# EAGLE board LilyPad_Light_Sensor-Panel_v20 (EAGLE 7.7.0), part 1 of 4
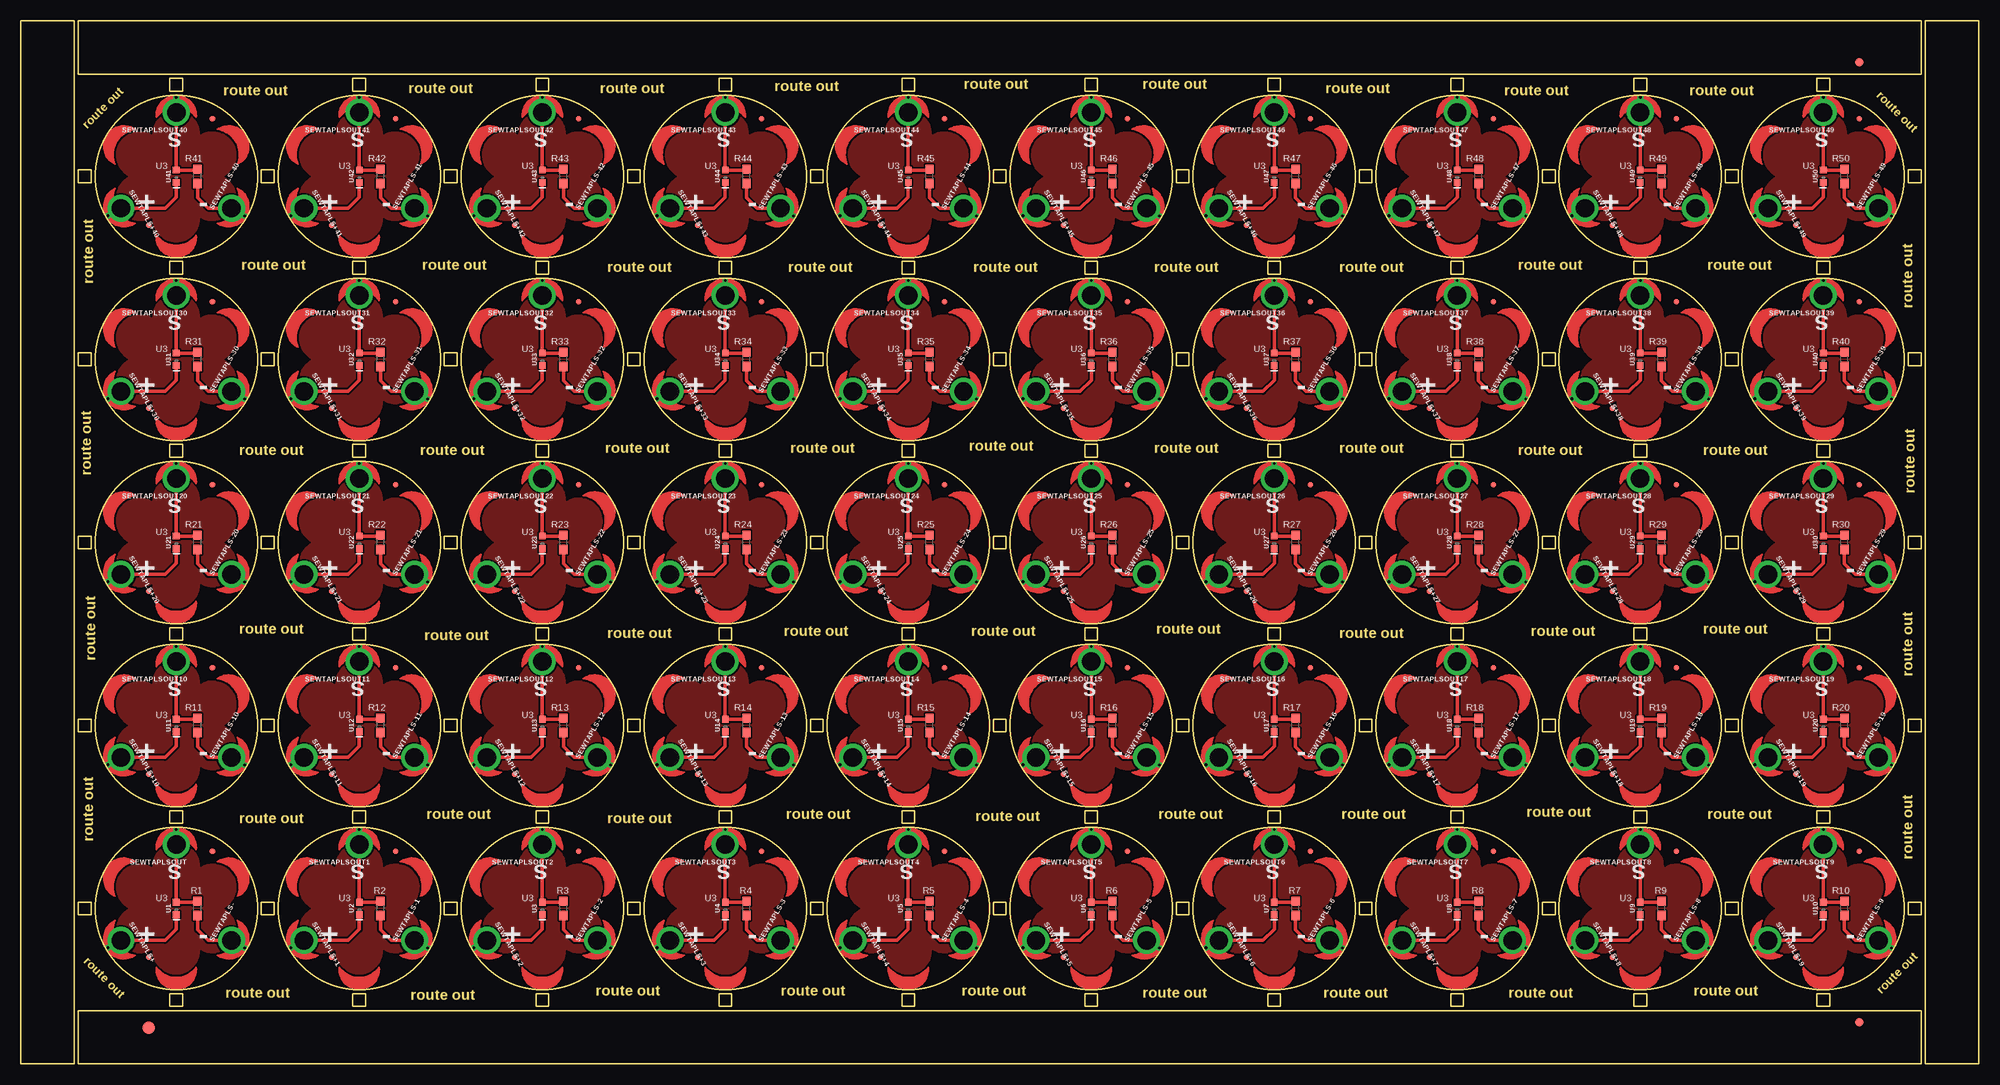
[diagram p0: board, top side]
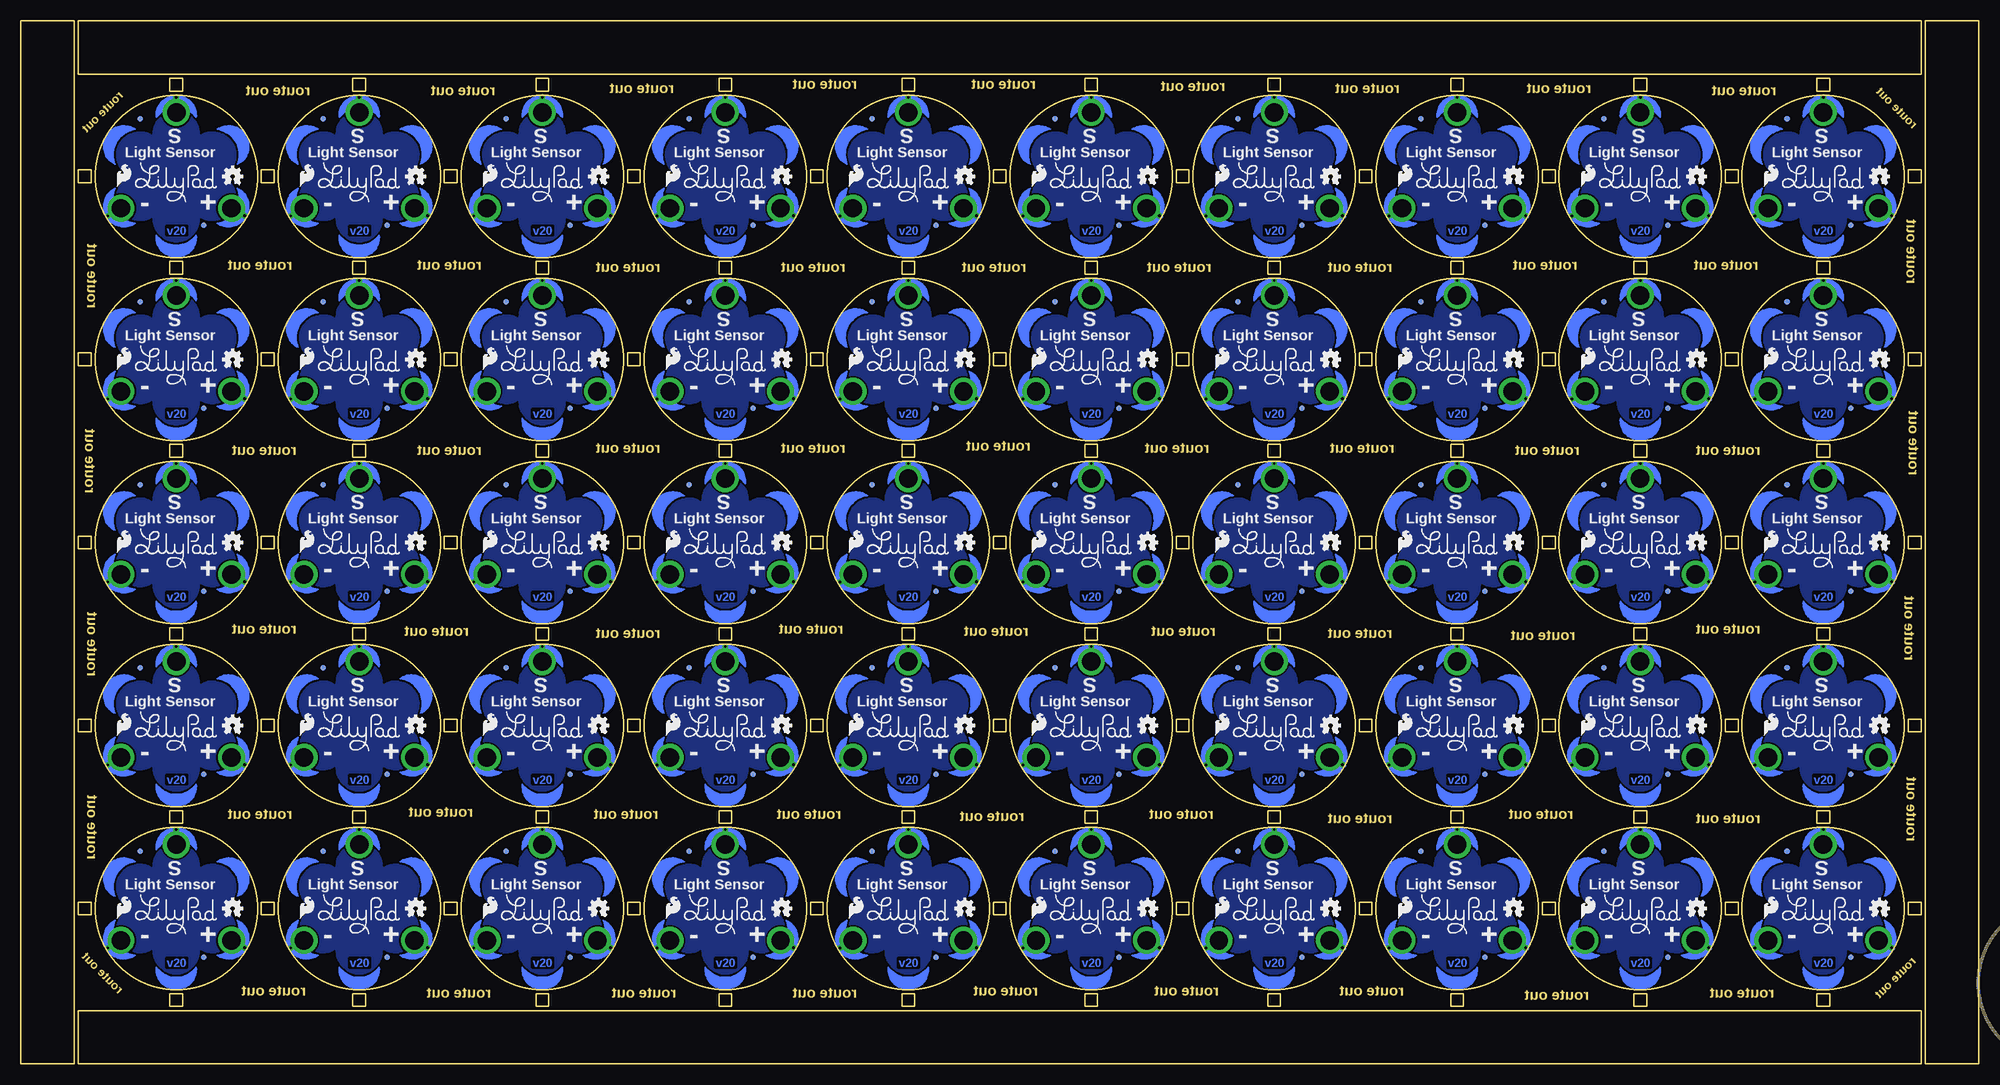
[diagram p1: board, bottom side, seen from below]

Size 233.68 x 124.46 mm. Coordinates in mm from the lower left corner, seen from the top.
Outline: 6.35,78.99 6.35,0 0,0 0,29.46
Outline: 0,26.92 0,124.46 6.35,124.46 6.35,76.45
Outline: 79.25,0 6.86,0 6.86,6.35 29.72,6.35
Outline: 27.18,6.35 226.82,6.35 226.82,0 76.71,0
Outline: 154.43,124.46 226.82,124.46 226.82,118.11 203.96,118.11
Outline: 206.5,118.11 6.86,118.11 6.86,124.46 156.97,124.46
Outline: 227.33,45.21 227.33,124.46 233.68,124.46 233.68,94.74
Outline: 233.68,97.28 233.68,0 227.33,0 227.33,47.75
Outline: 19.3,6.86 19.3,8.38 17.78,8.38 17.78,6.86 19.3,6.86
Outline: 8.38,17.78 8.38,19.3 6.86,19.3 6.86,17.78 8.38,17.78
Outline: 41.15,6.86 41.15,8.38 39.62,8.38 39.62,6.86 41.15,6.86
Outline: 30.23,17.78 30.23,19.3 28.7,19.3 28.7,17.78 30.23,17.78
Outline: 62.99,6.86 62.99,8.38 61.47,8.38 61.47,6.86 62.99,6.86
Outline: 52.07,17.78 52.07,19.3 50.55,19.3 50.55,17.78 52.07,17.78
Outline: 84.84,6.86 84.84,8.38 83.31,8.38 83.31,6.86 84.84,6.86
Outline: 73.91,17.78 73.91,19.3 72.39,19.3 72.39,17.78 73.91,17.78
Outline: 106.68,6.86 106.68,8.38 105.16,8.38 105.16,6.86 106.68,6.86
Outline: 95.76,17.78 95.76,19.3 94.23,19.3 94.23,17.78 95.76,17.78
Outline: 128.52,6.86 128.52,8.38 127,8.38 127,6.86 128.52,6.86
Outline: 117.6,17.78 117.6,19.3 116.08,19.3 116.08,17.78 117.6,17.78
Outline: 150.37,6.86 150.37,8.38 148.84,8.38 148.84,6.86 150.37,6.86
Outline: 139.45,17.78 139.45,19.3 137.92,19.3 137.92,17.78 139.45,17.78
Outline: 172.21,6.86 172.21,8.38 170.69,8.38 170.69,6.86 172.21,6.86
Outline: 161.29,17.78 161.29,19.3 159.77,19.3 159.77,17.78 161.29,17.78
Outline: 194.06,6.86 194.06,8.38 192.53,8.38 192.53,6.86 194.06,6.86
Outline: 183.13,17.78 183.13,19.3 181.61,19.3 181.61,17.78 183.13,17.78
Outline: 215.9,6.86 215.9,8.38 214.38,8.38 214.38,6.86 215.9,6.86
Outline: 204.98,17.78 204.98,19.3 203.45,19.3 203.45,17.78 204.98,17.78
Outline: 226.82,17.78 226.82,19.3 225.3,19.3 225.3,17.78 226.82,17.78
Outline: 19.3,28.7 19.3,30.23 17.78,30.23 17.78,28.7 19.3,28.7
Outline: 8.38,39.62 8.38,41.15 6.86,41.15 6.86,39.62 8.38,39.62
Outline: 41.15,28.7 41.15,30.23 39.62,30.23 39.62,28.7 41.15,28.7
Outline: 30.23,39.62 30.23,41.15 28.7,41.15 28.7,39.62 30.23,39.62
Outline: 62.99,28.7 62.99,30.23 61.47,30.23 61.47,28.7 62.99,28.7
Outline: 52.07,39.62 52.07,41.15 50.55,41.15 50.55,39.62 52.07,39.62
Outline: 84.84,28.7 84.84,30.23 83.31,30.23 83.31,28.7 84.84,28.7
Outline: 73.91,39.62 73.91,41.15 72.39,41.15 72.39,39.62 73.91,39.62
Outline: 106.68,28.7 106.68,30.23 105.16,30.23 105.16,28.7 106.68,28.7
Outline: 95.76,39.62 95.76,41.15 94.23,41.15 94.23,39.62 95.76,39.62
Outline: 128.52,28.7 128.52,30.23 127,30.23 127,28.7 128.52,28.7
Outline: 117.6,39.62 117.6,41.15 116.08,41.15 116.08,39.62 117.6,39.62
Outline: 150.37,28.7 150.37,30.23 148.84,30.23 148.84,28.7 150.37,28.7
Outline: 139.45,39.62 139.45,41.15 137.92,41.15 137.92,39.62 139.45,39.62
Outline: 172.21,28.7 172.21,30.23 170.69,30.23 170.69,28.7 172.21,28.7
Outline: 161.29,39.62 161.29,41.15 159.77,41.15 159.77,39.62 161.29,39.62
Outline: 194.06,28.7 194.06,30.23 192.53,30.23 192.53,28.7 194.06,28.7
Outline: 183.13,39.62 183.13,41.15 181.61,41.15 181.61,39.62 183.13,39.62
Outline: 215.9,28.7 215.9,30.23 214.38,30.23 214.38,28.7 215.9,28.7
Outline: 204.98,39.62 204.98,41.15 203.45,41.15 203.45,39.62 204.98,39.62
Outline: 226.82,39.62 226.82,41.15 225.3,41.15 225.3,39.62 226.82,39.62
Outline: 19.3,50.55 19.3,52.07 17.78,52.07 17.78,50.55 19.3,50.55
Outline: 8.38,61.47 8.38,62.99 6.86,62.99 6.86,61.47 8.38,61.47
Outline: 41.15,50.55 41.15,52.07 39.62,52.07 39.62,50.55 41.15,50.55
Outline: 30.23,61.47 30.23,62.99 28.7,62.99 28.7,61.47 30.23,61.47
Outline: 62.99,50.55 62.99,52.07 61.47,52.07 61.47,50.55 62.99,50.55
Outline: 52.07,61.47 52.07,62.99 50.55,62.99 50.55,61.47 52.07,61.47
Outline: 84.84,50.55 84.84,52.07 83.31,52.07 83.31,50.55 84.84,50.55
Outline: 73.91,61.47 73.91,62.99 72.39,62.99 72.39,61.47 73.91,61.47
Outline: 106.68,50.55 106.68,52.07 105.16,52.07 105.16,50.55 106.68,50.55
Outline: 95.76,61.47 95.76,62.99 94.23,62.99 94.23,61.47 95.76,61.47
Outline: 128.52,50.55 128.52,52.07 127,52.07 127,50.55 128.52,50.55
Outline: 117.6,61.47 117.6,62.99 116.08,62.99 116.08,61.47 117.6,61.47
Outline: 150.37,50.55 150.37,52.07 148.84,52.07 148.84,50.55 150.37,50.55
Outline: 139.45,61.47 139.45,62.99 137.92,62.99 137.92,61.47 139.45,61.47
Outline: 172.21,50.55 172.21,52.07 170.69,52.07 170.69,50.55 172.21,50.55
Outline: 161.29,61.47 161.29,62.99 159.77,62.99 159.77,61.47 161.29,61.47
Outline: 194.06,50.55 194.06,52.07 192.53,52.07 192.53,50.55 194.06,50.55
Outline: 183.13,61.47 183.13,62.99 181.61,62.99 181.61,61.47 183.13,61.47
Outline: 215.9,50.55 215.9,52.07 214.38,52.07 214.38,50.55 215.9,50.55
Outline: 204.98,61.47 204.98,62.99 203.45,62.99 203.45,61.47 204.98,61.47
Outline: 226.82,61.47 226.82,62.99 225.3,62.99 225.3,61.47 226.82,61.47
Outline: 19.3,72.39 19.3,73.91 17.78,73.91 17.78,72.39 19.3,72.39
Outline: 8.38,83.31 8.38,84.84 6.86,84.84 6.86,83.31 8.38,83.31
Outline: 41.15,72.39 41.15,73.91 39.62,73.91 39.62,72.39 41.15,72.39
Outline: 30.23,83.31 30.23,84.84 28.7,84.84 28.7,83.31 30.23,83.31
Outline: 62.99,72.39 62.99,73.91 61.47,73.91 61.47,72.39 62.99,72.39
Outline: 52.07,83.31 52.07,84.84 50.55,84.84 50.55,83.31 52.07,83.31
Outline: 84.84,72.39 84.84,73.91 83.31,73.91 83.31,72.39 84.84,72.39
Outline: 73.91,83.31 73.91,84.84 72.39,84.84 72.39,83.31 73.91,83.31
Outline: 106.68,72.39 106.68,73.91 105.16,73.91 105.16,72.39 106.68,72.39
Outline: 95.76,83.31 95.76,84.84 94.23,84.84 94.23,83.31 95.76,83.31
Outline: 128.52,72.39 128.52,73.91 127,73.91 127,72.39 128.52,72.39
Outline: 117.6,83.31 117.6,84.84 116.08,84.84 116.08,83.31 117.6,83.31
Outline: 150.37,72.39 150.37,73.91 148.84,73.91 148.84,72.39 150.37,72.39
Outline: 139.45,83.31 139.45,84.84 137.92,84.84 137.92,83.31 139.45,83.31
Outline: 172.21,72.39 172.21,73.91 170.69,73.91 170.69,72.39 172.21,72.39
Outline: 161.29,83.31 161.29,84.84 159.77,84.84 159.77,83.31 161.29,83.31
Outline: 194.06,72.39 194.06,73.91 192.53,73.91 192.53,72.39 194.06,72.39
Outline: 183.13,83.31 183.13,84.84 181.61,84.84 181.61,83.31 183.13,83.31
Outline: 215.9,72.39 215.9,73.91 214.38,73.91 214.38,72.39 215.9,72.39
Outline: 204.98,83.31 204.98,84.84 203.45,84.84 203.45,83.31 204.98,83.31
Outline: 226.82,83.31 226.82,84.84 225.3,84.84 225.3,83.31 226.82,83.31
Outline: 19.3,116.08 19.3,117.6 17.78,117.6 17.78,116.08 19.3,116.08
Outline: 19.3,94.23 19.3,95.76 17.78,95.76 17.78,94.23 19.3,94.23
Outline: 8.38,105.16 8.38,106.68 6.86,106.68 6.86,105.16 8.38,105.16
Outline: 41.15,116.08 41.15,117.6 39.62,117.6 39.62,116.08 41.15,116.08
Outline: 41.15,94.23 41.15,95.76 39.62,95.76 39.62,94.23 41.15,94.23
Outline: 30.23,105.16 30.23,106.68 28.7,106.68 28.7,105.16 30.23,105.16
Outline: 62.99,116.08 62.99,117.6 61.47,117.6 61.47,116.08 62.99,116.08
Outline: 62.99,94.23 62.99,95.76 61.47,95.76 61.47,94.23 62.99,94.23
Outline: 52.07,105.16 52.07,106.68 50.55,106.68 50.55,105.16 52.07,105.16
Outline: 84.84,116.08 84.84,117.6 83.31,117.6 83.31,116.08 84.84,116.08
Outline: 84.84,94.23 84.84,95.76 83.31,95.76 83.31,94.23 84.84,94.23
Outline: 73.91,105.16 73.91,106.68 72.39,106.68 72.39,105.16 73.91,105.16
Outline: 106.68,116.08 106.68,117.6 105.16,117.6 105.16,116.08 106.68,116.08
Outline: 106.68,94.23 106.68,95.76 105.16,95.76 105.16,94.23 106.68,94.23
Outline: 95.76,105.16 95.76,106.68 94.23,106.68 94.23,105.16 95.76,105.16
Outline: 128.52,116.08 128.52,117.6 127,117.6 127,116.08 128.52,116.08
Outline: 128.52,94.23 128.52,95.76 127,95.76 127,94.23 128.52,94.23
Outline: 117.6,105.16 117.6,106.68 116.08,106.68 116.08,105.16 117.6,105.16
Outline: 150.37,116.08 150.37,117.6 148.84,117.6 148.84,116.08 150.37,116.08
Outline: 150.37,94.23 150.37,95.76 148.84,95.76 148.84,94.23 150.37,94.23
Outline: 139.45,105.16 139.45,106.68 137.92,106.68 137.92,105.16 139.45,105.16
Outline: 172.21,116.08 172.21,117.6 170.69,117.6 170.69,116.08 172.21,116.08
Outline: 172.21,94.23 172.21,95.76 170.69,95.76 170.69,94.23 172.21,94.23
Outline: 161.29,105.16 161.29,106.68 159.77,106.68 159.77,105.16 161.29,105.16
Outline: 194.06,116.08 194.06,117.6 192.53,117.6 192.53,116.08 194.06,116.08
Outline: 194.06,94.23 194.06,95.76 192.53,95.76 192.53,94.23 194.06,94.23
Outline: 183.13,105.16 183.13,106.68 181.61,106.68 181.61,105.16 183.13,105.16
Outline: 215.9,116.08 215.9,117.6 214.38,117.6 214.38,116.08 215.9,116.08
Outline: 215.9,94.23 215.9,95.76 214.38,95.76 214.38,94.23 215.9,94.23
Outline: 204.98,105.16 204.98,106.68 203.45,106.68 203.45,105.16 204.98,105.16
Outline: 226.82,105.16 226.82,106.68 225.3,106.68 225.3,105.16 226.82,105.16
Outline: circle at 18.54,18.54 radius 9.65
Outline: circle at 40.39,18.54 radius 9.65
Outline: circle at 62.23,18.54 radius 9.65
Outline: circle at 84.07,18.54 radius 9.65
Outline: circle at 105.92,18.54 radius 9.65
Outline: circle at 127.76,18.54 radius 9.65
Outline: circle at 149.61,18.54 radius 9.65
Outline: circle at 171.45,18.54 radius 9.65
Outline: circle at 193.29,18.54 radius 9.65
Outline: circle at 215.14,18.54 radius 9.65
Outline: circle at 18.54,40.39 radius 9.65
Outline: circle at 40.39,40.39 radius 9.65
Outline: circle at 62.23,40.39 radius 9.65
Outline: circle at 84.07,40.39 radius 9.65
Outline: circle at 105.92,40.39 radius 9.65
Outline: circle at 127.76,40.39 radius 9.65
Outline: circle at 149.61,40.39 radius 9.65
Outline: circle at 171.45,40.39 radius 9.65
Outline: circle at 193.29,40.39 radius 9.65
Outline: circle at 215.14,40.39 radius 9.65
Copper layers (1*16): Top 0.035mm / dielectric 1.5mm / Bottom 0.035mm
Design rules "SparkFun-2-layer-TIGHT *": minimum track width 7mil, minimum drill 15mil, track to track 8mil, track to pad 8mil, pad to pad 8mil, via to via 8mil, smd to smd 8mil, copper to edge 7mil, drill to drill 7mil, minimum pad ring 7mil, minimum via ring 7mil, stop-mask expansion 4mil, vias tented up to drill 25mil, thermal gap 10mil
tRestrict: area 13.2,23.6 to 23.9,28.7; area 8.2,18.5 to 15.6,27.7; area 8.2,9.4 to 15.6,18.5; area 13.5,8.4 to 23.9,13.5; area 21.5,9.4 to 29.2,18.5; area 21.5,18.5 to 29.2,27.7; area 35.1,23.6 to 45.7,28.7; area 30,18.5 to 37.5,27.7; area 30,9.4 to 37.5,18.5; area 35.4,8.4 to 45.7,13.5; area 43.3,9.4 to 51,18.5; area 43.3,18.5 to 51,27.7; area 56.9,23.6 to 67.6,28.7; area 51.9,18.5 to 59.3,27.7; area 51.9,9.4 to 59.3,18.5; area 57.2,8.4 to 67.6,13.5; area 65.2,9.4 to 72.9,18.5; area 65.2,18.5 to 72.9,27.7; area 78.7,23.6 to 89.4,28.7; area 73.7,18.5 to 81.2,27.7; area 73.7,9.4 to 81.2,18.5; area 79.1,8.4 to 89.4,13.5; area 87,9.4 to 94.7,18.5; area 87,18.5 to 94.7,27.7; area 100.6,23.6 to 111.2,28.7; area 95.6,18.5 to 103,27.7; area 95.6,9.4 to 103,18.5; area 100.9,8.4 to 111.2,13.5; area 108.8,9.4 to 116.6,18.5; area 108.8,18.5 to 116.6,27.7; area 122.4,23.6 to 133.1,28.7; area 117.4,18.5 to 124.8,27.7; area 117.4,9.4 to 124.8,18.5; area 122.8,8.4 to 133.1,13.5; area 130.7,9.4 to 138.4,18.5; area 130.7,18.5 to 138.4,27.7; area 144.3,23.6 to 154.9,28.7; area 139.3,18.5 to 146.7,27.7; area 139.3,9.4 to 146.7,18.5; area 144.6,8.4 to 154.9,13.5; area 152.5,9.4 to 160.3,18.5; area 152.5,18.5 to 160.3,27.7; area 166.1,23.6 to 176.8,28.7; area 161.1,18.5 to 168.5,27.7; area 161.1,9.4 to 168.5,18.5; area 166.4,8.4 to 176.8,13.5; area 174.4,9.4 to 182.1,18.5; area 174.4,18.5 to 182.1,27.7; area 188,23.6 to 198.6,28.7; area 183,18.5 to 190.4,27.7; area 183,9.4 to 190.4,18.5; area 188.3,8.4 to 198.6,13.5; area 196.2,9.4 to 204,18.5; area 196.2,18.5 to 204,27.7; area 209.8,23.6 to 220.5,28.7; area 204.8,18.5 to 212.2,27.7; area 204.8,9.4 to 212.2,18.5; area 210.1,8.4 to 220.5,13.5; area 218.1,9.4 to 225.8,18.5; area 218.1,18.5 to 225.8,27.7; area 13.2,45.4 to 23.9,50.5; area 8.2,40.4 to 15.6,49.5; area 8.2,31.2 to 15.6,40.4; area 13.5,30.2 to 23.9,35.3; area 21.5,31.2 to 29.2,40.4; area 21.5,40.4 to 29.2,49.5; area 35.1,45.4 to 45.7,50.5; area 30,40.4 to 37.5,49.5; area 30,31.2 to 37.5,40.4; area 35.4,30.2 to 45.7,35.3; area 43.3,31.2 to 51,40.4; area 43.3,40.4 to 51,49.5; area 56.9,45.4 to 67.6,50.5; area 51.9,40.4 to 59.3,49.5; area 51.9,31.2 to 59.3,40.4; area 57.2,30.2 to 67.6,35.3; area 65.2,31.2 to 72.9,40.4; area 65.2,40.4 to 72.9,49.5; area 78.7,45.4 to 89.4,50.5; area 73.7,40.4 to 81.2,49.5; area 73.7,31.2 to 81.2,40.4; area 79.1,30.2 to 89.4,35.3; area 87,31.2 to 94.7,40.4; area 87,40.4 to 94.7,49.5; area 100.6,45.4 to 111.2,50.5; area 95.6,40.4 to 103,49.5; area 95.6,31.2 to 103,40.4; area 100.9,30.2 to 111.2,35.3; area 108.8,31.2 to 116.6,40.4; area 108.8,40.4 to 116.6,49.5; area 122.4,45.4 to 133.1,50.5; area 117.4,40.4 to 124.8,49.5; area 117.4,31.2 to 124.8,40.4; area 122.8,30.2 to 133.1,35.3; area 130.7,31.2 to 138.4,40.4; area 130.7,40.4 to 138.4,49.5; area 144.3,45.4 to 154.9,50.5; area 139.3,40.4 to 146.7,49.5; area 139.3,31.2 to 146.7,40.4; area 144.6,30.2 to 154.9,35.3; area 152.5,31.2 to 160.3,40.4; area 152.5,40.4 to 160.3,49.5; area 166.1,45.4 to 176.8,50.5; area 161.1,40.4 to 168.5,49.5; area 161.1,31.2 to 168.5,40.4; area 166.4,30.2 to 176.8,35.3; area 174.4,31.2 to 182.1,40.4; area 174.4,40.4 to 182.1,49.5; area 188,45.4 to 198.6,50.5; area 183,40.4 to 190.4,49.5; area 183,31.2 to 190.4,40.4; area 188.3,30.2 to 198.6,35.3; area 196.2,31.2 to 204,40.4; area 196.2,40.4 to 204,49.5; area 209.8,45.4 to 220.5,50.5; area 204.8,40.4 to 212.2,49.5; area 204.8,31.2 to 212.2,40.4; area 210.1,30.2 to 220.5,35.3; area 218.1,31.2 to 225.8,40.4; area 218.1,40.4 to 225.8,49.5; area 13.2,67.3 to 23.9,72.4; area 8.2,62.2 to 15.6,71.4; area 8.2,53.1 to 15.6,62.2; area 13.5,52.1 to 23.9,57.2; area 21.5,53.1 to 29.2,62.2; area 21.5,62.2 to 29.2,71.4; area 35.1,67.3 to 45.7,72.4; area 30,62.2 to 37.5,71.4; area 30,53.1 to 37.5,62.2; area 35.4,52.1 to 45.7,57.2; area 43.3,53.1 to 51,62.2; area 43.3,62.2 to 51,71.4; area 56.9,67.3 to 67.6,72.4; area 51.9,62.2 to 59.3,71.4; area 51.9,53.1 to 59.3,62.2; area 57.2,52.1 to 67.6,57.2; area 65.2,53.1 to 72.9,62.2; area 65.2,62.2 to 72.9,71.4; area 78.7,67.3 to 89.4,72.4; area 73.7,62.2 to 81.2,71.4; area 73.7,53.1 to 81.2,62.2; area 79.1,52.1 to 89.4,57.2; area 87,53.1 to 94.7,62.2; area 87,62.2 to 94.7,71.4; area 100.6,67.3 to 111.2,72.4; area 95.6,62.2 to 103,71.4; area 95.6,53.1 to 103,62.2; area 100.9,52.1 to 111.2,57.2; area 108.8,53.1 to 116.6,62.2; area 108.8,62.2 to 116.6,71.4; area 122.4,67.3 to 133.1,72.4; area 117.4,62.2 to 124.8,71.4; area 117.4,53.1 to 124.8,62.2; area 122.8,52.1 to 133.1,57.2; area 130.7,53.1 to 138.4,62.2; area 130.7,62.2 to 138.4,71.4; area 144.3,67.3 to 154.9,72.4; area 139.3,62.2 to 146.7,71.4; area 139.3,53.1 to 146.7,62.2; area 144.6,52.1 to 154.9,57.2; area 152.5,53.1 to 160.3,62.2; area 152.5,62.2 to 160.3,71.4; area 166.1,67.3 to 176.8,72.4; area 161.1,62.2 to 168.5,71.4; area 161.1,53.1 to 168.5,62.2; area 166.4,52.1 to 176.8,57.2; area 174.4,53.1 to 182.1,62.2; area 174.4,62.2 to 182.1,71.4; area 188,67.3 to 198.6,72.4; area 183,62.2 to 190.4,71.4; area 183,53.1 to 190.4,62.2; area 188.3,52.1 to 198.6,57.2; area 196.2,53.1 to 204,62.2; area 196.2,62.2 to 204,71.4; area 209.8,67.3 to 220.5,72.4; area 204.8,62.2 to 212.2,71.4; area 204.8,53.1 to 212.2,62.2; area 210.1,52.1 to 220.5,57.2; area 218.1,53.1 to 225.8,62.2; area 218.1,62.2 to 225.8,71.4; area 13.2,89.1 to 23.9,94.2; area 8.2,84.1 to 15.6,93.2; area 8.2,74.9 to 15.6,84.1; area 13.5,73.9 to 23.9,79; area 21.5,74.9 to 29.2,84.1; area 21.5,84.1 to 29.2,93.2; area 35.1,89.1 to 45.7,94.2; area 30,84.1 to 37.5,93.2; area 30,74.9 to 37.5,84.1; area 35.4,73.9 to 45.7,79; area 43.3,74.9 to 51,84.1; area 43.3,84.1 to 51,93.2; area 56.9,89.1 to 67.6,94.2; area 51.9,84.1 to 59.3,93.2; area 51.9,74.9 to 59.3,84.1; area 57.2,73.9 to 67.6,79; area 65.2,74.9 to 72.9,84.1; area 65.2,84.1 to 72.9,93.2; area 78.7,89.1 to 89.4,94.2; area 73.7,84.1 to 81.2,93.2; area 73.7,74.9 to 81.2,84.1; area 79.1,73.9 to 89.4,79; area 87,74.9 to 94.7,84.1; area 87,84.1 to 94.7,93.2; area 100.6,89.1 to 111.2,94.2; area 95.6,84.1 to 103,93.2; area 95.6,74.9 to 103,84.1; area 100.9,73.9 to 111.2,79; area 108.8,74.9 to 116.6,84.1; area 108.8,84.1 to 116.6,93.2; area 122.4,89.1 to 133.1,94.2; area 117.4,84.1 to 124.8,93.2; area 117.4,74.9 to 124.8,84.1; area 122.8,73.9 to 133.1,79; area 130.7,74.9 to 138.4,84.1; area 130.7,84.1 to 138.4,93.2; area 144.3,89.1 to 154.9,94.2; area 139.3,84.1 to 146.7,93.2; area 139.3,74.9 to 146.7,84.1; area 144.6,73.9 to 154.9,79; area 152.5,74.9 to 160.3,84.1; area 152.5,84.1 to 160.3,93.2; area 166.1,89.1 to 176.8,94.2; area 161.1,84.1 to 168.5,93.2; area 161.1,74.9 to 168.5,84.1; area 166.4,73.9 to 176.8,79; area 174.4,74.9 to 182.1,84.1; area 174.4,84.1 to 182.1,93.2; area 188,89.1 to 198.6,94.2; area 183,84.1 to 190.4,93.2; area 183,74.9 to 190.4,84.1; area 188.3,73.9 to 198.6,79; area 196.2,74.9 to 204,84.1; area 196.2,84.1 to 204,93.2; area 209.8,89.1 to 220.5,94.2; area 204.8,84.1 to 212.2,93.2; area 204.8,74.9 to 212.2,84.1; area 210.1,73.9 to 220.5,79; area 218.1,74.9 to 225.8,84.1; area 218.1,84.1 to 225.8,93.2; area 13.2,111 to 23.9,116.1; area 8.2,105.9 to 15.6,115.1; area 8.2,96.8 to 15.6,105.9; area 13.5,95.8 to 23.9,100.9; area 21.5,96.8 to 29.2,105.9; area 21.5,105.9 to 29.2,115.1; area 35.1,111 to 45.7,116.1; area 30,105.9 to 37.5,115.1; area 30,96.8 to 37.5,105.9; area 35.4,95.8 to 45.7,100.9; area 43.3,96.8 to 51,105.9; area 43.3,105.9 to 51,115.1; area 56.9,111 to 67.6,116.1; area 51.9,105.9 to 59.3,115.1; area 51.9,96.8 to 59.3,105.9; area 57.2,95.8 to 67.6,100.9; area 65.2,96.8 to 72.9,105.9; area 65.2,105.9 to 72.9,115.1; area 78.7,111 to 89.4,116.1; area 73.7,105.9 to 81.2,115.1; area 73.7,96.8 to 81.2,105.9; area 79.1,95.8 to 89.4,100.9; area 87,96.8 to 94.7,105.9; area 87,105.9 to 94.7,115.1; area 100.6,111 to 111.2,116.1; area 95.6,105.9 to 103,115.1; area 95.6,96.8 to 103,105.9; area 100.9,95.8 to 111.2,100.9; area 108.8,96.8 to 116.6,105.9; area 108.8,105.9 to 116.6,115.1; area 122.4,111 to 133.1,116.1; area 117.4,105.9 to 124.8,115.1; area 117.4,96.8 to 124.8,105.9; area 122.8,95.8 to 133.1,100.9; area 130.7,96.8 to 138.4,105.9; area 130.7,105.9 to 138.4,115.1; area 144.3,111 to 154.9,116.1; area 139.3,105.9 to 146.7,115.1; area 139.3,96.8 to 146.7,105.9; area 144.6,95.8 to 154.9,100.9; area 152.5,96.8 to 160.3,105.9; area 152.5,105.9 to 160.3,115.1; area 166.1,111 to 176.8,116.1; area 161.1,105.9 to 168.5,115.1; area 161.1,96.8 to 168.5,105.9; area 166.4,95.8 to 176.8,100.9; area 174.4,96.8 to 182.1,105.9; area 174.4,105.9 to 182.1,115.1; area 188,111 to 198.6,116.1; area 183,105.9 to 190.4,115.1; area 183,96.8 to 190.4,105.9; area 188.3,95.8 to 198.6,100.9; area 196.2,96.8 to 204,105.9; area 196.2,105.9 to 204,115.1; area 209.8,111 to 220.5,116.1; area 204.8,105.9 to 212.2,115.1; area 204.8,96.8 to 212.2,105.9; area 210.1,95.8 to 220.5,100.9; area 218.1,96.8 to 225.8,105.9; area 218.1,105.9 to 225.8,115.1
bRestrict: area 13.2,23.6 to 23.9,28.7; area 8.2,18.5 to 15.6,27.7; area 8.2,9.4 to 15.6,18.5; area 13.5,8.4 to 23.9,13.5; area 21.5,9.4 to 29.2,18.5; area 21.5,18.5 to 29.2,27.7; area 35.1,23.6 to 45.7,28.7; area 30,18.5 to 37.5,27.7; area 30,9.4 to 37.5,18.5; area 35.4,8.4 to 45.7,13.5; area 43.3,9.4 to 51,18.5; area 43.3,18.5 to 51,27.7; area 56.9,23.6 to 67.6,28.7; area 51.9,18.5 to 59.3,27.7; area 51.9,9.4 to 59.3,18.5; area 57.2,8.4 to 67.6,13.5; area 65.2,9.4 to 72.9,18.5; area 65.2,18.5 to 72.9,27.7; area 78.7,23.6 to 89.4,28.7; area 73.7,18.5 to 81.2,27.7; area 73.7,9.4 to 81.2,18.5; area 79.1,8.4 to 89.4,13.5; area 87,9.4 to 94.7,18.5; area 87,18.5 to 94.7,27.7; area 100.6,23.6 to 111.2,28.7; area 95.6,18.5 to 103,27.7; area 95.6,9.4 to 103,18.5; area 100.9,8.4 to 111.2,13.5; area 108.8,9.4 to 116.6,18.5; area 108.8,18.5 to 116.6,27.7; area 122.4,23.6 to 133.1,28.7; area 117.4,18.5 to 124.8,27.7; area 117.4,9.4 to 124.8,18.5; area 122.8,8.4 to 133.1,13.5; area 130.7,9.4 to 138.4,18.5; area 130.7,18.5 to 138.4,27.7; area 144.3,23.6 to 154.9,28.7; area 139.3,18.5 to 146.7,27.7; area 139.3,9.4 to 146.7,18.5; area 144.6,8.4 to 154.9,13.5; area 152.5,9.4 to 160.3,18.5; area 152.5,18.5 to 160.3,27.7; area 166.1,23.6 to 176.8,28.7; area 161.1,18.5 to 168.5,27.7; area 161.1,9.4 to 168.5,18.5; area 166.4,8.4 to 176.8,13.5; area 174.4,9.4 to 182.1,18.5; area 174.4,18.5 to 182.1,27.7; area 188,23.6 to 198.6,28.7; area 183,18.5 to 190.4,27.7; area 183,9.4 to 190.4,18.5; area 188.3,8.4 to 198.6,13.5; area 196.2,9.4 to 204,18.5; area 196.2,18.5 to 204,27.7; area 209.8,23.6 to 220.5,28.7; area 204.8,18.5 to 212.2,27.7; area 204.8,9.4 to 212.2,18.5; area 210.1,8.4 to 220.5,13.5; area 218.1,9.4 to 225.8,18.5; area 218.1,18.5 to 225.8,27.7; area 13.2,45.4 to 23.9,50.5; area 8.2,40.4 to 15.6,49.5; area 8.2,31.2 to 15.6,40.4; area 13.5,30.2 to 23.9,35.3; area 21.5,31.2 to 29.2,40.4; area 21.5,40.4 to 29.2,49.5; area 35.1,45.4 to 45.7,50.5; area 30,40.4 to 37.5,49.5; area 30,31.2 to 37.5,40.4; area 35.4,30.2 to 45.7,35.3; area 43.3,31.2 to 51,40.4; area 43.3,40.4 to 51,49.5; area 56.9,45.4 to 67.6,50.5; area 51.9,40.4 to 59.3,49.5; area 51.9,31.2 to 59.3,40.4; area 57.2,30.2 to 67.6,35.3; area 65.2,31.2 to 72.9,40.4; area 65.2,40.4 to 72.9,49.5; area 78.7,45.4 to 89.4,50.5; area 73.7,40.4 to 81.2,49.5; area 73.7,31.2 to 81.2,40.4; area 79.1,30.2 to 89.4,35.3; area 87,31.2 to 94.7,40.4; area 87,40.4 to 94.7,49.5; area 100.6,45.4 to 111.2,50.5; area 95.6,40.4 to 103,49.5; area 95.6,31.2 to 103,40.4; area 100.9,30.2 to 111.2,35.3; area 108.8,31.2 to 116.6,40.4; area 108.8,40.4 to 116.6,49.5; area 122.4,45.4 to 133.1,50.5; area 117.4,40.4 to 124.8,49.5; area 117.4,31.2 to 124.8,40.4; area 122.8,30.2 to 133.1,35.3; area 130.7,31.2 to 138.4,40.4; area 130.7,40.4 to 138.4,49.5; area 144.3,45.4 to 154.9,50.5; area 139.3,40.4 to 146.7,49.5; area 139.3,31.2 to 146.7,40.4; area 144.6,30.2 to 154.9,35.3; area 152.5,31.2 to 160.3,40.4; area 152.5,40.4 to 160.3,49.5; area 166.1,45.4 to 176.8,50.5; area 161.1,40.4 to 168.5,49.5; area 161.1,31.2 to 168.5,40.4; area 166.4,30.2 to 176.8,35.3; area 174.4,31.2 to 182.1,40.4; area 174.4,40.4 to 182.1,49.5; area 188,45.4 to 198.6,50.5; area 183,40.4 to 190.4,49.5; area 183,31.2 to 190.4,40.4; area 188.3,30.2 to 198.6,35.3; area 196.2,31.2 to 204,40.4; area 196.2,40.4 to 204,49.5; area 209.8,45.4 to 220.5,50.5; area 204.8,40.4 to 212.2,49.5; area 204.8,31.2 to 212.2,40.4; area 210.1,30.2 to 220.5,35.3; area 218.1,31.2 to 225.8,40.4; area 218.1,40.4 to 225.8,49.5; area 13.2,67.3 to 23.9,72.4; area 8.2,62.2 to 15.6,71.4; area 8.2,53.1 to 15.6,62.2; area 13.5,52.1 to 23.9,57.2; area 21.5,53.1 to 29.2,62.2; area 21.5,62.2 to 29.2,71.4; area 35.1,67.3 to 45.7,72.4; area 30,62.2 to 37.5,71.4; area 30,53.1 to 37.5,62.2; area 35.4,52.1 to 45.7,57.2; area 43.3,53.1 to 51,62.2; area 43.3,62.2 to 51,71.4; area 56.9,67.3 to 67.6,72.4; area 51.9,62.2 to 59.3,71.4; area 51.9,53.1 to 59.3,62.2; area 57.2,52.1 to 67.6,57.2; area 65.2,53.1 to 72.9,62.2; area 65.2,62.2 to 72.9,71.4; area 78.7,67.3 to 89.4,72.4; area 73.7,62.2 to 81.2,71.4; area 73.7,53.1 to 81.2,62.2; area 79.1,52.1 to 89.4,57.2; area 87,53.1 to 94.7,62.2; area 87,62.2 to 94.7,71.4; area 100.6,67.3 to 111.2,72.4; area 95.6,62.2 to 103,71.4; area 95.6,53.1 to 103,62.2; area 100.9,52.1 to 111.2,57.2; area 108.8,53.1 to 116.6,62.2; area 108.8,62.2 to 116.6,71.4; area 122.4,67.3 to 133.1,72.4; area 117.4,62.2 to 124.8,71.4; area 117.4,53.1 to 124.8,62.2; area 122.8,52.1 to 133.1,57.2; area 130.7,53.1 to 138.4,62.2; area 130.7,62.2 to 138.4,71.4; area 144.3,67.3 to 154.9,72.4; area 139.3,62.2 to 146.7,71.4; area 139.3,53.1 to 146.7,62.2; area 144.6,52.1 to 154.9,57.2; area 152.5,53.1 to 160.3,62.2; area 152.5,62.2 to 160.3,71.4; area 166.1,67.3 to 176.8,72.4; area 161.1,62.2 to 168.5,71.4; area 161.1,53.1 to 168.5,62.2; area 166.4,52.1 to 176.8,57.2; area 174.4,53.1 to 182.1,62.2; area 174.4,62.2 to 182.1,71.4; area 188,67.3 to 198.6,72.4; area 183,62.2 to 190.4,71.4; area 183,53.1 to 190.4,62.2; area 188.3,52.1 to 198.6,57.2; area 196.2,53.1 to 204,62.2; area 196.2,62.2 to 204,71.4; area 209.8,67.3 to 220.5,72.4; area 204.8,62.2 to 212.2,71.4; area 204.8,53.1 to 212.2,62.2; area 210.1,52.1 to 220.5,57.2; area 218.1,53.1 to 225.8,62.2; area 218.1,62.2 to 225.8,71.4; area 13.2,89.1 to 23.9,94.2; area 8.2,84.1 to 15.6,93.2; area 8.2,74.9 to 15.6,84.1; area 13.5,73.9 to 23.9,79; area 21.5,74.9 to 29.2,84.1; area 21.5,84.1 to 29.2,93.2; area 35.1,89.1 to 45.7,94.2; area 30,84.1 to 37.5,93.2; area 30,74.9 to 37.5,84.1; area 35.4,73.9 to 45.7,79; area 43.3,74.9 to 51,84.1; area 43.3,84.1 to 51,93.2; area 56.9,89.1 to 67.6,94.2; area 51.9,84.1 to 59.3,93.2; area 51.9,74.9 to 59.3,84.1; area 57.2,73.9 to 67.6,79; area 65.2,74.9 to 72.9,84.1; area 65.2,84.1 to 72.9,93.2; area 78.7,89.1 to 89.4,94.2; area 73.7,84.1 to 81.2,93.2; area 73.7,74.9 to 81.2,84.1; area 79.1,73.9 to 89.4,79; area 87,74.9 to 94.7,84.1; area 87,84.1 to 94.7,93.2; area 100.6,89.1 to 111.2,94.2; area 95.6,84.1 to 103,93.2; area 95.6,74.9 to 103,84.1; area 100.9,73.9 to 111.2,79; area 108.8,74.9 to 116.6,84.1; area 108.8,84.1 to 116.6,93.2; area 122.4,89.1 to 133.1,94.2; area 117.4,84.1 to 124.8,93.2; area 117.4,74.9 to 124.8,84.1; area 122.8,73.9 to 133.1,79; area 130.7,74.9 to 138.4,84.1; area 130.7,84.1 to 138.4,93.2; area 144.3,89.1 to 154.9,94.2; area 139.3,84.1 to 146.7,93.2; area 139.3,74.9 to 146.7,84.1; area 144.6,73.9 to 154.9,79; area 152.5,74.9 to 160.3,84.1; area 152.5,84.1 to 160.3,93.2; area 166.1,89.1 to 176.8,94.2; area 161.1,84.1 to 168.5,93.2; area 161.1,74.9 to 168.5,84.1; area 166.4,73.9 to 176.8,79; area 174.4,74.9 to 182.1,84.1; area 174.4,84.1 to 182.1,93.2; area 188,89.1 to 198.6,94.2; area 183,84.1 to 190.4,93.2; area 183,74.9 to 190.4,84.1; area 188.3,73.9 to 198.6,79; area 196.2,74.9 to 204,84.1; area 196.2,84.1 to 204,93.2; area 209.8,89.1 to 220.5,94.2; area 204.8,84.1 to 212.2,93.2; area 204.8,74.9 to 212.2,84.1; area 210.1,73.9 to 220.5,79; area 218.1,74.9 to 225.8,84.1; area 218.1,84.1 to 225.8,93.2; area 13.2,111 to 23.9,116.1; area 8.2,105.9 to 15.6,115.1; area 8.2,96.8 to 15.6,105.9; area 13.5,95.8 to 23.9,100.9; area 21.5,96.8 to 29.2,105.9; area 21.5,105.9 to 29.2,115.1; area 35.1,111 to 45.7,116.1; area 30,105.9 to 37.5,115.1; area 30,96.8 to 37.5,105.9; area 35.4,95.8 to 45.7,100.9; area 43.3,96.8 to 51,105.9; area 43.3,105.9 to 51,115.1; area 56.9,111 to 67.6,116.1; area 51.9,105.9 to 59.3,115.1; area 51.9,96.8 to 59.3,105.9; area 57.2,95.8 to 67.6,100.9; area 65.2,96.8 to 72.9,105.9; area 65.2,105.9 to 72.9,115.1; area 78.7,111 to 89.4,116.1; area 73.7,105.9 to 81.2,115.1; area 73.7,96.8 to 81.2,105.9; area 79.1,95.8 to 89.4,100.9; area 87,96.8 to 94.7,105.9; area 87,105.9 to 94.7,115.1; area 100.6,111 to 111.2,116.1; area 95.6,105.9 to 103,115.1; area 95.6,96.8 to 103,105.9; area 100.9,95.8 to 111.2,100.9; area 108.8,96.8 to 116.6,105.9; area 108.8,105.9 to 116.6,115.1; area 122.4,111 to 133.1,116.1; area 117.4,105.9 to 124.8,115.1; area 117.4,96.8 to 124.8,105.9; area 122.8,95.8 to 133.1,100.9; area 130.7,96.8 to 138.4,105.9; area 130.7,105.9 to 138.4,115.1; area 144.3,111 to 154.9,116.1; area 139.3,105.9 to 146.7,115.1; area 139.3,96.8 to 146.7,105.9; area 144.6,95.8 to 154.9,100.9; area 152.5,96.8 to 160.3,105.9; area 152.5,105.9 to 160.3,115.1; area 166.1,111 to 176.8,116.1; area 161.1,105.9 to 168.5,115.1; area 161.1,96.8 to 168.5,105.9; area 166.4,95.8 to 176.8,100.9; area 174.4,96.8 to 182.1,105.9; area 174.4,105.9 to 182.1,115.1; area 188,111 to 198.6,116.1; area 183,105.9 to 190.4,115.1; area 183,96.8 to 190.4,105.9; area 188.3,95.8 to 198.6,100.9; area 196.2,96.8 to 204,105.9; area 196.2,105.9 to 204,115.1; area 209.8,111 to 220.5,116.1; area 204.8,105.9 to 212.2,115.1; area 204.8,96.8 to 212.2,105.9; area 210.1,95.8 to 220.5,100.9; area 218.1,96.8 to 225.8,105.9; area 218.1,105.9 to 225.8,115.1

## Footprints (pad centres in the part's own frame; a part is rotated, then mirrored left to right if it is on the bottom)
FIDUCIAL-1.5X3 = smd 1.5 x 1.5: 1 0,0
FIDUCIAL-1X2 = smd 1 x 1: 1 0,0
FIDUCIAL-MICRO = smd 0.635 x 0.635: 1 0,0
0603 = smd 1.1 x 1: 1 -0.85,0; 2 0.85,0
PETAL-SMALL-2SIDE = drill 2.2: 1 0,0
ALS-PT19 = smd 0.8 x 0.8: C -0.75,0; E 0.75,0